# Altium PCB PCB.PcbDoc
Units mm, origin at the board's own origin, x right, y up, seen from the top; angles counter-clockwise.
Board outline 80 x 25 mm, 4 copper layers (Top Layer, Signal Layer 1, Signal Layer 2, Bottom Layer), stack 0.778 mm thick; 103 components, 73 nets, 319 pads, 114 vias.
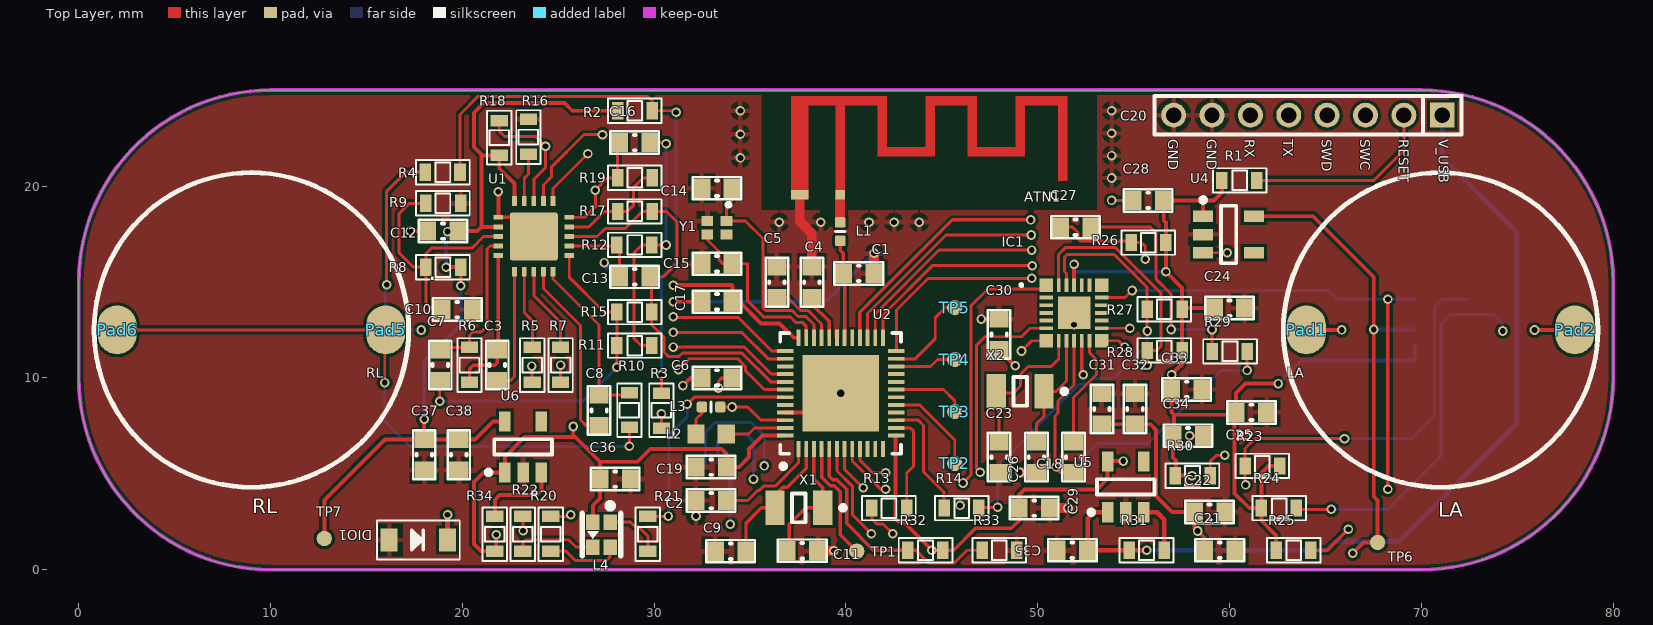
[diagram p0: Top Layer view]
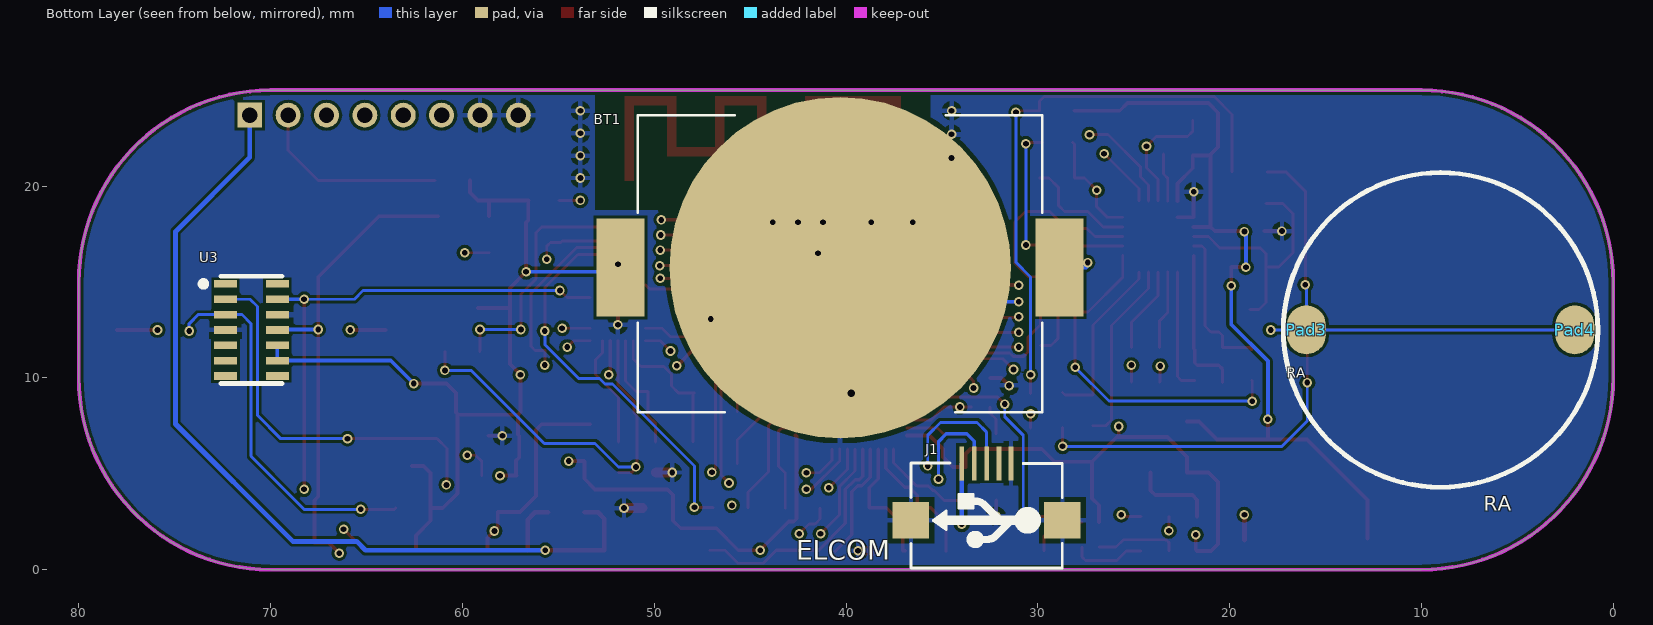
[diagram p1: Bottom Layer view, seen from below]
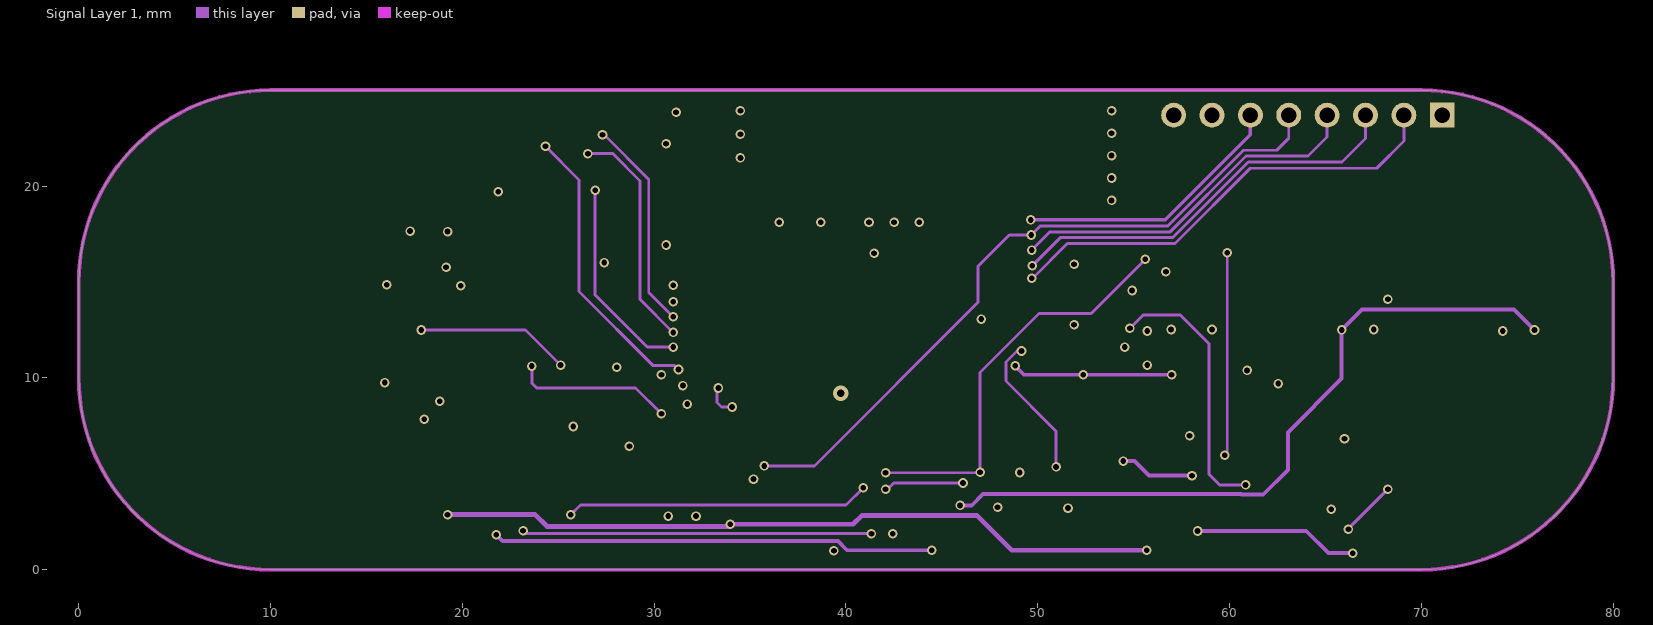
[diagram p2: Signal Layer 1]
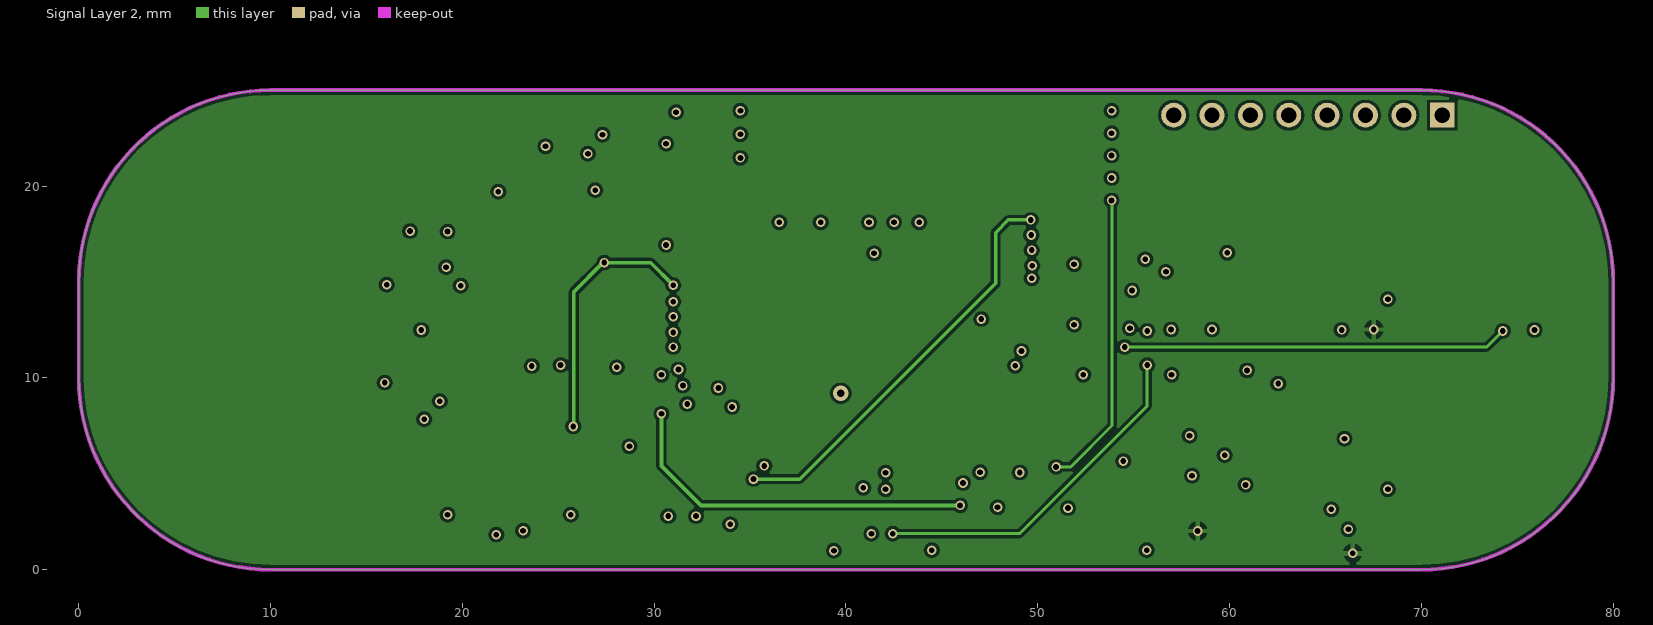
[diagram p3: Signal Layer 2]
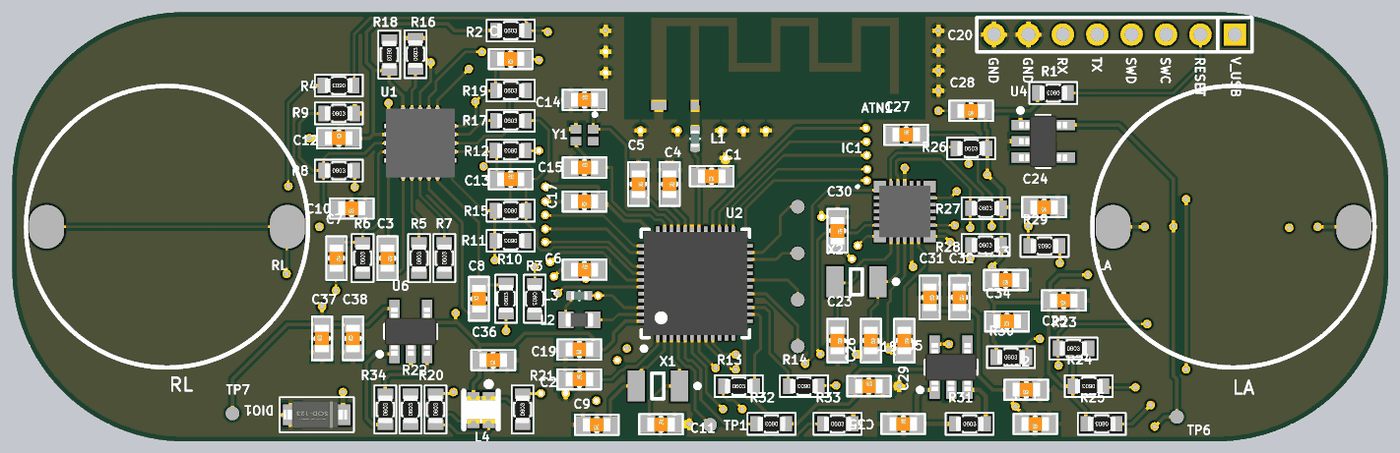
[diagram p4: 3D render of the assembled board from above, using the file's embedded part models]
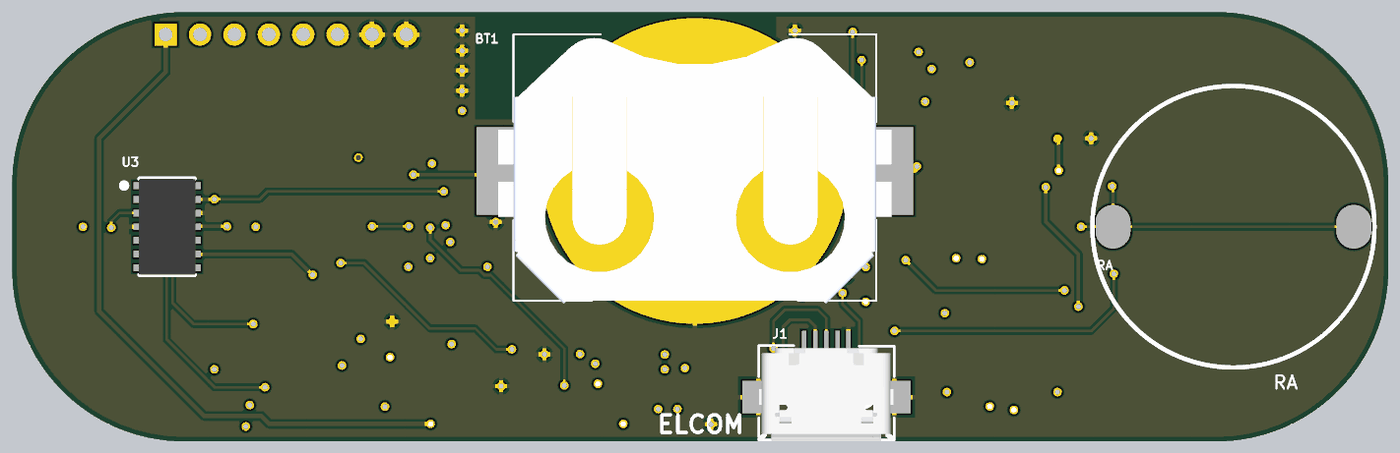
[diagram p5: 3D render of the assembled board from below, using the file's embedded part models]

## Layer stack, top to bottom
Top Solder: solder mask 0.0102, Solder Resist, Dk 3.5
Top Layer: signal copper 0.0356
Dielectric 1: core 0.254, FR-4, Dk 4.2
Signal Layer 1: signal copper 0.036
Dielectric 3: prepreg 0.127, Dk 4.2
Signal Layer 2: signal copper 0.036
Dielectric 2: core 0.254, Dk 4.2
Bottom Layer: signal copper 0.0356
Bottom Solder: solder mask 0.0102, Solder Resist, Dk 3.5

## Board outline
0,10 0,15 cw(c10,15) 10,25 70,25 cw(c70,15) 80,15 80,10 cw(c70,10) 70,0 10,0 cw(c10,10)

## Design rules (kind name [scope] priority, off if disabled: settings)
Clearance [All] p1: gap=0.152
PolygonConnect [All] p1: connectstyle=Relief reliefconductorwidth=0.254 reliefentries=4 polygonreliefangle="90 Angle" airgapwidth=0.254
RoomDefinition [2]Controler [InComponentClass('[2]Controler')] p1: confinementstyle=ConfineIn formatcopy=TRUE lockcomponents=FALSE outline 90.551,40.259 443.611,40.259 443.611,60.706 90.551,60.706
RoomDefinition [1]Power [InComponentClass('[1]Power')] p2: confinementstyle=ConfineIn formatcopy=TRUE lockcomponents=FALSE outline 90.551,0.127 241.046,0.127 241.046,39.116 90.551,39.116
RoutingVias [All] p1: holewidth=0.3 width=0.5 viastyle="Through Hole" minholewidth=0.3 minwidth=0.5 maxholewidth=0.45 maxwidth=0.8
SolderMaskExpansion [All] p1: expansion=0.102
Width [All] p1: maxlimit=1.27 minlimit=0.152 preferedwidth=0.178
30 further rules are at their usual default settings.

## Classes and differential pairs
component class [1]Power: BT1 C30 C31 C32 C33 C34 C35 C36 C37 C38 DIO1 J1 R30 R31 R32 R33 R34 R35 TP6 TP7 U4 U5 U6
component class [2]Controler: ATN1 C1 C2 C3 C4 C5 C6 C7 C8 C9 C10 C11 C12 C13 C14 C15 C16 C17 C18 C19 C20 C21 C22 C23 C24 C25 C26 C27 C28 C29 IC1 L1 L2 L3 L4 Pad1 Pad2 Pad3 Pad4 Pad5 Pad6 R1 R2 R3 R4 R5 R6 R7 R8 R9 R10 R11 R12 R13 R14 R15 R16 R17 R18 R19 R20 R21 R22 R23 R24 R25 R26 R27 R28 R29 TP1 TP2 TP3 TP4 TP5 U1 U2 U3 X1 X2 X? Y1

## Components (designator, comment, footprint, x,y, rotation, side; value= is the part's Value field where it differs from the comment)
ATN1 "P-ANT" "Antenna 2G4" 37.592,21.742 r0 top locked
BT1 "BAT-HLD-001" BAT_BAT-HLD-001 40.31,15.748 r0 bottom
C1 "0.8uF" CN-SMD-0603 40.665,15.443 r180 top
C2 "0.1uF" CN-SMD-0603 32.969,3.607 r0 top
C3 "4.7uF" CN-SMD-0603 21.819,10.668 r270 top
C4 "0.1uF" CN-SMD-0603 38.221,14.986 r270 top
C5 "0.1uF" CN-SMD-0603 36.398,14.986 r270 top
C6 "1uF" CN-SMD-0603 33.274,10.003 r0 top
C7 "4.7uF" CN-SMD-0603 18.847,10.668 r270 top
C8 "1nF" CN-SMD-0603 27.127,8.306 r90 top
C9 "12pF" CN-SMD-0603 33.985,0.965 r180 top
C10 "0.1uF" CN-SMD-0603 19.736,13.564 r180 top
C11 "12pF" CN-SMD-0603 37.719,0.991 r0 top
C12 "0.1uF" CN-SMD-0603 18.987,17.653 r0 top
C13 "6.8nF" CN-SMD-0603 28.981,15.272 r0 top
C14 "12pF" CN-SMD-0603 33.274,19.888 r0 top
C15 "12pF" CN-SMD-0603 33.274,15.951 r0 top
C16 "2.7nF" CN-SMD-0603 28.981,22.268 r180 top
C17 "10uF" CN-SMD-0603 33.274,13.97 r180 top
C18 "0.1uF" CN-SMD-0603 49.809,3.212 r0 top
C19 "0.1uF" CN-SMD-0603 32.969,5.349 r180 top
C20 "JP8x1-2.0" J8-D1T 64.084,23.698 r180 top
C21 "0.1uF" CN-SMD-0603 59.482,1.016 r180 top
C22 "10uF" CN-SMD-0603 58.953,3.004 r180 top
C23 "12pF" CN-SMD-0603 47.981,5.867 r270 top
C24 "0.1uF" CN-SMD-0603 59.995,13.64 r180 top
C25 "10uF" CN-SMD-0603 61.138,8.204 r180 top
C26 "12pF" CN-SMD-0603 49.924,5.867 r270 top
C27 "12pF" CN-SMD-0603 51.968,17.856 r0 top
C28 "12pF" CN-SMD-0603 55.753,19.253 r180 top
C29 "12pF" CN-SMD-0603 51.867,5.867 r270 top
C30 "10uF" CN-SMD-0603 47.981,12.268 r270 top
C31 "10uF" CN-SMD-0603 53.34,8.382 r270 top
C32 "10uF" CN-SMD-0603 55.067,8.382 r270 top
C33 "10uF" CN-SMD-0603 57.76,9.398 r180 top
C34 "10uF" CN-SMD-0603 57.836,6.985 r180 top
C35 "10uF" CN-SMD-0603 51.801,1.016 r0 top
C36 "10uF" CN-SMD-0603 27.965,4.724 r180 top
C37 "10uF" CN-SMD-0603 18.009,5.994 r90 top
C38 "10uF" CN-SMD-0603 19.812,5.994 r90 top
DIO1 "Diode SMD" DIO-SMD-123 17.704,1.549 r180 top
IC1 "MAX32664GTGD+" MAX32664GTGD 51.892,11.938 r0 top
J1 "USB-5" USB-M1 32.664,5.545 r0 bottom
L1 "15nH" "P-INDC-0402INDC1005X60N EIA" 39.7,17.628 r90 top
L2 "10uH" INDC1608X95N 32.969,7.076 r0 top
L3 "15nH" "P-INDC-0402INDC1005X60N EIA" 32.969,8.484 r180 top
L4 "Led RGB 0603 Anot" "Led RGB 0603 Anode" 27.254,1.829 r270 top
Pad1 "LA" pad_ecg#1 64,12.5 r90 top
Pad2 "LA" pad_ecg#2 77.241,11.557 r90 top
Pad3 "RA" pad_ecg#1 16,12.5 r90 bottom
Pad4 "pad_ecg" pad_ecg#3 2,12.5 r90 top
Pad5 "RL" pad_ecg#1 16,12.5 r90 top
Pad6 "pad_ecg" pad_ecg#1 2,12.5 r270 top
R1 "10K" RES-SMD-0603 60.528,20.295 r180 top
R2 "0R" RES-SMD-0603 28.981,23.927 r0 top
R3 "10M" RES-SMD-0603 30.378,8.306 r270 top
R4 "10M" RES-SMD-0603 18.987,20.726 r180 top
R5 "180K" RES-SMD-0603 23.647,10.668 r90 top
R6 "10M" RES-SMD-0603 20.371,10.668 r90 top
R7 "180K" RES-SMD-0603 25.121,10.668 r90 top
R8 "10M" RES-SMD-0603 18.987,15.773 r0 top
R9 "10M" RES-SMD-0603 18.987,19.101 r0 top
R10 "360K" RES-SMD-0603 28.708,8.306 r90 top
R11 "1M" RES-SMD-0603 28.981,11.684 r180 top
R12 "1M" RES-SMD-0603 28.981,16.931 r180 top
R13 "0R" RES-SMD-0603 42.24,3.212 r0 top
R14 "0R" RES-SMD-0603 46.037,3.212 r180 top
R15 "100K" RES-SMD-0603 28.981,13.433 r180 top
R16 "0R" RES-SMD-0603 23.444,22.555 r90 top
R17 "332K" RES-SMD-0603 28.981,18.68 r0 top
R18 "10K" RES-SMD-0603 21.92,22.53 r270 top
R19 "1M" RES-SMD-0603 28.981,20.429 r0 top
R20 "1K" RES-SMD-0603 24.613,1.854 r90 top
R21 "1K" RES-SMD-0603 29.667,1.854 r90 top
R22 "1K" RES-SMD-0603 23.152,1.854 r90 top
R23 "4.7K" RES-SMD-0603 61.697,5.41 r0 top
R24 "4.7K" RES-SMD-0603 62.586,3.213 r180 top
R25 "10K" RES-SMD-0603 63.348,1.016 r180 top
R26 "10K" RES-SMD-0603 55.753,17.055 r0 top
R27 "4.7K" RES-SMD-0603 56.591,13.584 r0 top
R28 "4.7K" RES-SMD-0603 56.591,11.43 r0 top
R29 "10R" RES-SMD-0603 60.02,11.379 r180 top
R30 "1K" RES-SMD-0603 58.064,4.902 r0 top
R31 "1K" RES-SMD-0603 55.667,1.016 r0 top
R32 "100K" RES-SMD-0603 44.145,1.016 r180 top
R33 "100K" RES-SMD-0603 47.986,1.016 r0 top
R34 "1K" RES-SMD-0603 21.692,1.854 r90 top
TP1 "TP" "P-TP 1MM" 40.564,0.965 r90 top
TP2 "TP" "P-TP 1MM" 45.669,5.537 r90 top
TP3 "TP" "P-TP 1MM" 45.669,8.247 r90 top
TP4 "TP" "P-TP 1MM" 45.669,10.956 r90 top
TP5 "TP" "P-TP 1MM" 45.669,13.665 r90 top
TP6 "TP" "P-TP 1MM" 67.716,1.422 r90 top
TP7 "TP" "P-TP 1MM" 12.802,1.626 r90 top
U1 "AD8232" LFCSP_20 23.724,17.374 r90 top
U2 "Nrf52832" QFN48_NRF52832 39.726,9.195 r90 top
U3 "MAX30101" MAX30101 71,12.5 r180 bottom
U4 "AP2112-1V8" SOT235_AP2112 59.944,17.475 r0 top
U5 "AP2112-3V3" SOT235_AP2112 54.585,4.318 r90 top
U6 "AP2112-2V8" SOT235_AP2112 23.165,6.401 r90 top
X1 "32.768KhZ" XT2-32.768KHz-2_V 37.541,3.226 r180 top
X2 "32.768KhZ" XT2-32.768KHz-2_V 49.081,9.296 r180 top
Y1 "ABM12" DFN160X120X45-4N 33.274,17.831 r270 top

## Footprints (in the part's own frame and the unit in brackets; to place one, negate y for a bottom-side part, rotate by r counter-clockwise, add the part's x,y. Pads: shape width x height; smd on the part's side, far side on the other; paste and mask are expansions set on the pad)
"Antenna 2G4" [mm]
  rect 0.9x0.5 smd: 1(0,-2.2)
  rect 0.5x0.5 smd: 2(2.1,-2.2)
  Top Layer region: -0.45,-2.45 0.45,-2.45 0.45,2.45 -0.45,2.45
  Top Layer region: -0.45,2.45 4.55,2.45 4.55,2.95 -0.45,2.95
  Top Layer region: 1.85,-2.45 2.35,-2.45 2.35,2.45 1.85,2.45
  Top Layer region: 4.05,-0.2 4.55,-0.2 4.55,2.45 4.05,2.45
  Top Layer region: 6.55,-0.2 6.55,0.3 4.55,0.3 4.55,-0.2
  Top Layer region: 6.55,-0.2 7.05,-0.2 7.05,2.45 6.55,2.45
  Top Layer region: 6.55,2.45 9.25,2.45 9.25,2.95 6.55,2.95
  Top Layer region: 11.25,2.45 13.95,2.45 13.95,2.95 11.25,2.95
  Top Layer region: 11.25,-0.2 11.75,-0.2 11.75,2.45 11.25,2.45
  Top Layer region: 11.25,-0.2 11.25,0.3 9.25,0.3 9.25,-0.2
  Top Layer region: 8.75,-0.2 9.25,-0.2 9.25,2.45 8.75,2.45
  Top Layer region: 13.45,-1.49 13.95,-1.49 13.95,2.45 13.45,2.45
  Top Layer pour cut-out: -2,5 -2,-3 15.5,-3 15.5,5
  Bottom Layer pour cut-out: -2,5 -2,-3 15.5,-3 15.5,5
BAT_BAT-HLD-001 [mm]
  round 17.8 smd paste-10: N1(0,0)
  rect 2.5x5.1 smd: P1(-11.45,0) P2(11.45,0)
  silkscreen extent -10.55,-7.95 10.55,7.55, body extent -11.43,-7.75 11.43,7.75, height 4.32
CN-SMD-0603 [mm]
  rect 0.9x1 smd: 1(-0.8,0) 2(0.8,0)
  silkscreen extent -1.27,-0.58 1.27,0.58, body extent -0.8,-0.4 0.8,0.4, height 0.3
DFN160X120X45-4N [mm]
  rect 0.51x0.61 smd: 1(-0.35,0.5) 2(-0.35,-0.5) 3(0.35,-0.5) 4(0.35,0.5)
  silkscreen extent -1.3,0.5 -1.1,0.7
DIO-SMD-123 [mm]
  rect 0.9x1.2 smd: 1(1.524,0) 2(-1.524,0)
  silkscreen extent -2.16,-1.02 2.16,1.02, body extent -1.76,-0.8 1.94,0.8, height 1.25
INDC1608X95N [mm]
  rect 0.9x0.97 smd: 1(-0.785,0) 2(0.785,0)
  body extent -0.8,-0.4 0.8,0.4, height 0.78
J8-D1T [mm] "8 pins, 1 row, straight, gold plating"
  rect 1.3x1.3 hole 0.8: 1(-7,0)
  round 1.3 hole 0.8: 2(-5,0) 3(-3,0) 4(-1,0) 5(1,0) 6(3,0) 7(5,0) 8(7,0)
  silkscreen extent -8,-1 8,1
"Led RGB 0603 Anode" [mm]
  rect 0.8x0.7 smd: 1(-0.65,0.45) 2(-0.65,-0.45) 3(0.65,-0.45) 4(0.65,0.45)
  silkscreen extent -1.65,-1 1.1,1, body extent -0.8,-0.85 0.8,0.85, height 0.75
LFCSP_20 [mm]
  rect 0.5x0.25 smd: 1(-1.85,1) 2(-1.85,0.5) 3(-1.85,0) 4(-1.85,-0.5) 5(-1.85,-1) 11(1.85,-1) 12(1.85,-0.5) 13(1.85,0) 14(1.85,0.5) 15(1.85,1)
  rect 0.25x0.5 smd: 6(-1,-1.85) 7(-0.5,-1.85) 8(0,-1.85) 9(0.5,-1.85) 10(1,-1.85) 16(1,1.85) 17(0.5,1.85) 18(0,1.85) 19(-0.5,1.85) 20(-1,1.85)
  rrect10% 2.5x2.5 smd paste-2: PAD(0,0)
  body extent -2.05,-2.05 2.05,2.05, height 0.8
MAX30101 [mm]
  rect 1.2x0.4 smd: 1(-1.35,2.4) 2(-1.35,1.6) 3(-1.35,0.8) 4(-1.35,0) 5(-1.35,-0.8) 6(-1.35,-1.6) 7(-1.35,-2.4) 8(1.35,-2.4) 9(1.35,-1.6) 10(1.35,-0.8) 11(1.35,0) 12(1.35,0.8) 13(1.35,1.6) 14(1.35,2.4)
  silkscreen extent -2.65,-2.8 1.6,2.8, body extent -1.65,-2.8 1.65,2.8, height 1.57
MAX32664GTGD [mm]
  rect 0.7x0.7 smd: 1(-1.45,2.9) 7(-1.45,0) 13(1.45,0) 19(1.45,2.9)
  rect 0.7x0.2 smd: 2(-1.45,2.25) 3(-1.45,1.85) 4(-1.45,1.45) 5(-1.45,1.05) 6(-1.45,0.65) 14(1.45,0.65) 15(1.45,1.05) 16(1.45,1.45) 17(1.45,1.85) 18(1.45,2.25)
  rect 0.2x0.7 smd: 8(-0.8,0) 9(-0.4,0) 10(0,0) 11(0.4,0) 12(0.8,0) 20(0.8,2.9) 21(0.4,2.9) 22(0,2.9) 23(-0.4,2.9) 24(-0.8,2.9)
  rect 1.7x1.7 smd: 25(0,1.45)
  silkscreen extent -2.8,2.85 -2.7,2.95, body extent -1.5,-0.05 1.5,2.95, height 0.9
"P-INDC-0402INDC1005X60N EIA" [mm]
  rrect30% 0.55x0.55 smd mask+0.05: 1(-0.48,0) 2(0.48,0)
  silkscreen extent 0,-0.25 0,0.25, body extent -0.5,-0.25 0.5,0.25, height 0.6
"P-TP 1MM" [mm]
  round 0.8 smd mask+0.051: 1(0,0)
pad_ecg#1 [mil]
  oval 100x80 smd: 0(0,0)
pad_ecg#2 [mil]
  oval 100x80 smd: 0(37.13,-29.87)
pad_ecg#3 [mil]
  oval 100x80 smd far side: 0(0,0)
QFN48_NRF52832 [mm]
  rect 0.85x0.2 smd: 1(-2.9,2.2) 2(-2.9,1.8) 3(-2.9,1.4) 4(-2.9,1) 5(-2.9,0.6) 6(-2.9,0.2) 7(-2.9,-0.2) 8(-2.9,-0.6) 9(-2.9,-1) 10(-2.9,-1.4) 11(-2.9,-1.8) 12(-2.9,-2.2) 25(2.9,-2.2) 26(2.9,-1.8) 27(2.9,-1.4) 28(2.9,-1) 29(2.9,-0.6) 30(2.9,-0.2) 31(2.9,0.2) 32(2.9,0.6) 33(2.9,1) 34(2.9,1.4) 35(2.9,1.8) 36(2.9,2.2)
  rect 0.2x0.85 smd: 13(-2.2,-2.9) 14(-1.8,-2.9) 15(-1.4,-2.9) 16(-1,-2.9) 17(-0.6,-2.9) 18(-0.2,-2.9) 19(0.2,-2.9) 20(0.6,-2.9) 21(1,-2.9) 22(1.4,-2.9) 23(1.8,-2.9) 24(2.2,-2.9) 37(2.2,2.9) 38(1.8,2.9) 39(1.4,2.9) 40(1,2.9) 41(0.6,2.9) 42(0.2,2.9) 43(-0.2,2.9) 44(-0.6,2.9) 45(-1,2.9) 46(-1.4,2.9) 47(-1.8,2.9) 48(-2.2,2.9)
  rect 4x4 smd: 49(0,0)
  silkscreen extent -3.92,-3.15 3.15,3.15, body extent -3.02,-3.02 3.02,3.02, height 0.85
RES-SMD-0603 [mm]
  rect 0.6x0.9 smd: 1(-0.889,0) 2(0.927,0)
  silkscreen extent -1.4,-0.64 1.4,0.64, body extent -0.8,-0.4 0.8,0.4, height 0.43
SOT235_AP2112 [mm]
  rect 1.05x0.6 smd: 1(-1.325,0.95) 2(-1.325,0) 3(-1.325,-0.95) 4(1.325,-0.95) 5(1.325,0.95)
  silkscreen extent -1.45,-1.5 0.4,1.92, body extent -1.4,-1.5 1.4,1.5, height 1.2
USB-M1 [mil]
  rect 10x70 smd: 1(51.18,0) 2(25.59,0) 3(0,0) 4(-25.59,0) 5(-50,0)
  rect 74.8x74.8 smd: 5(-155.51,116.84) 5(155.51,116.84)
  silkscreen extent -155,-1 155,215, body extent -157,5 158,218, height 107
XT2-32.768KHz-2_V [mm] "Hand Drawn, 2-Leads, Body 3.2x1.5mm, Pitch 2.5mm"
  rect 1x1.8 smd: 1(-1.25,0) 2(1.25,0)
  silkscreen extent -2.43,-0.75 0.35,0.75, body extent -1.6,-0.75 1.6,0.75, height 0.9

## Part data
BT1: "Holder for CR2032 and CR2025 Batteries, Surface-Mount, Bulk Packaging"
C1 C2 C3 C4 C5 C6 C7 C8 C9 C10 C11 C12 C13 C14 C15 C16 C17 C18 C19 C21 C22 C23 C24 C25 C26 C27 C28 C29 C30 C31 C32 C33 C34 C35 C36 C37 C38: library part CN, "Tu gom"
C20: "WR-PHD 2.00 mm Socket Header"
DIO1: "Default Diode"
IC1: "Integrated Circuit"
L1 L3: library part P-INDC-0603
L2: library part ASMCI-0603-100N-T, "Ind Chip Shielded Multi-Layer 10uH 30% 1MHz Ferrite 50mA 0603 T/R"
Pad1 Pad2 Pad3 Pad5: library part pad_ecg, "pad_ecg"
R1 R2 R3 R4 R5 R6 R7 R8 R9 R10 R11 R12 R13 R14 R15 R16 R17 R18 R19 R20 R21 R22 R23 R24 R25 R26 R27 R28 R29 R30 R31 R32 R33 R34: library part Res-SMD, "Resistor"
TP1 TP2 TP3 TP4 TP5 TP6 TP7: library part P-TESTPOINT
U1: "ECG Front End 20-LFCSP-WQ _4x4_"
U2: "BLE SoC"
U3: "Pulse oximeter and Heart rate sensor"
U4 U5: "600mA CMOS LDO REGULATOR WITH ENABLE"
U6: library part AP2112-1V8, "600mA CMOS LDO REGULATOR WITH ENABLE"
X1 X2: library part XT2, "Crystal, 32.768 KHz, -40 to 85 degC, 3.2 x 1.5 x 0.9 mm SMD"
Y1: library part ABM12-32.000MHZ-B2X-T3

## Via types
v1: diameter 0.5, hole 0.3, Top Layer to Bottom Layer, 113 vias
v2: diameter 0.8, hole 0.4, Top Layer to Bottom Layer, 1 vias

## Nets (pads, with @x,y where several pads share a name; then routed paths per layer and width w, separated by ;. In a path a pad name is that pad's centre, name@x,y a point inside that pad or via, vN(x,y) a via of type N, cw(c..) or ccw(c..) an arc to the next point about the centre after c; other vN are vias at no path point)
1V8: C21.2 C22.2 C31.2 C32.2 TP6.1 U3.11 U4.5 | length 44.7
  Top Layer w0.203: C31.2 C32.2 55.867,7.582 56.159,7.29 56.159,3.835 56.991,3.004 C22.2 58.153,2.197 v1(58.331,2.019) 58.682,1.668 C21.2 ; U4.5 64.353,18.425 67.513,15.265 v1(67.513,12.522) 67.513,3.81 67.716,3.607 TP6.1 66.98,1.422 v1(66.421,0.864)
  Signal Layer 1 w0.203: v1(58.331,2.019) 63.995,2.019 65.151,0.864 v1(66.421,0.864)
  Bottom Layer w0.203: v1(67.513,12.522) 69.628,12.522 U3.11
2V8: C12.2 C37.2 C38.2 R2.1 R8.2 R18.2 TP7.1 U1.15 U1.17 U6.5 | length 45.9
  Top Layer w0.203: TP7.1 12.802,3.632 15.964,6.794 C37.2 ; v1(18.009,7.849) C37.2 ; v1(19.151,15.774) R8.2 v1(19.914,14.808) ; v1(19.228,17.628) 19.253,17.653 C12.2 20.777,17.653 20.998,17.874 ; U1.17 20.998,17.874 ; U6.5 21.594,7.726 20.663,6.794 C38.2 C37.2 ; U1.15 22.724,20.126 21.92,20.929 R18.2 21.044,21.603 ; R2.1 25.73,23.927 25.324,24.333 21.107,24.333 20.599,23.825 20.599,22.047 21.044,21.603 ; 20.998,17.874 20.998,21.557 21.044,21.603
  Bottom Layer w0.203: v1(18.009,7.849) 18.009,10.871 19.914,12.776 v1(19.914,14.808) ; v1(19.151,15.774) 19.151,17.551 v1(19.228,17.628)
3V3: BT1.P1 BT1.P2 C17.1 C18.1 C19.1 C24.2 C25.2 C28.1 C30.2 C33.2 C34.2 C36.2 IC1.11 IC1.22 L4.2 R1.2 R23.2 R24.2 R25.2 R26.2 R27.2 R28.2 R30.1 R32.1 R34.1 U2.13 U2.36 U2.48 U3.9 U3.10 U4.1 U5.5 U6.1 | length 166
  Top Layer w0.203: v1(21.768,1.829) 21.768,1.041 R34.1 20.98,0.965 20.599,1.346 20.599,4.572 21.103,5.076 U6.1 22.215,5.883 23.241,6.909 25.883,6.909 ; v1(25.781,7.468) 25.781,7.01 25.883,6.909 ; L4.2 26.804,3.36 27.165,3.721 C36.2 27.165,5.626 ; v1(30.988,14.834) 34.036,14.834 34.074,14.796 C17.1 34.443,13.97 35.571,12.842 36.535,12.842 37.283,12.095 U2.36 ; U2.48 35.646,6.995 34.95,6.299 34.95,5.867 34.432,5.349 C19.1 33.769,6.033 33.503,6.299 29.794,6.299 29.121,5.626 27.165,5.626 ; U2.13 42.575,6.944 42.575,2.657 42.724,2.508 42.983,2.508 v1(44.475,1.016) R32.1 45.618,1.016 46.761,2.159 48.616,2.159 49.009,2.553 C18.1 49.009,3.899 49.301,4.191 53.086,4.191 53.635,4.74 U5.5 53.656,5.664 v1(54.458,5.664) ; C30.2 v1(48.819,10.63) ; IC1.22 v1(51.892,15.926) ; IC1.11 52.292,10.242 v1(52.371,10.163) ; v1@56.96,10.163 C33.2 56.96,8.217 57.099,8.077 ; v1@56.962,10.176 57.518,10.731 R28.2 R27.2 ; v1(58.039,4.902) R30.1 57.201,4.928 57.201,5.69 57.036,5.855 C34.2 57.099,7.048 57.099,8.077 ; U4.1 58.619,19.249 58.623,19.253 ; C24.2 57.573,13.64 R27.2 ; R1.2 59.601,19.673 59.182,19.253 58.623,19.253 ; R25.2 62.421,1.79 61.659,2.552 R24.2 ; v1(62.535,9.703) 60.833,9.703 60.338,9.208 C25.2 C25.2@60.254,8.12 ; R23.2 62.027,5.41 61.659,5.042 R24.2 ; 25.883,6.909 27.165,5.626 ; 57.099,8.077 60.211,8.077 C25.2@60.254,8.12 ; R27.2 57.518,14.694 v1(56.68,15.532) R26.2 56.68,18.098 56.566,18.212 56.566,19.24 C28.1 58.623,19.253 ; C25.2@60.254,8.12 60.254,3.983 61.024,3.213 R24.2
  Signal Layer 1 w0.203: v1(21.768,1.829) 22.102,1.495 39.579,1.495 40.057,1.016 v1(44.475,1.016) ; v1(48.819,10.63) 49.286,10.163 v1(52.371,10.163) v1(56.975,10.163) ; v1(54.458,5.664) 55.042,5.664 55.804,4.902 v1(58.039,4.902)
  Signal Layer 2 w0.203: v1(25.781,7.468) 25.806,7.493 25.806,14.478 27.341,16.012 v1(27.403,16.012) 27.392,16.002 29.82,16.002 v1(30.988,14.834)
  Bottom Layer w0.203: v1(27.403,16.012) 27.403,15.828 27.483,15.748 BT1.P1 ; BT1.P2 51.975,15.532 v1(56.68,15.532) ; v1(62.535,9.703) 63.732,10.9 U3.9 U3.10
DEC1: C2.2 U2.1 | length 5.3
  Top Layer w0.152: C2.2 34.874,3.607 35.408,4.14 35.482,4.14 35.697,4.354 36.308,4.354 37.526,5.572 U2.1
DEC2: C4.2 U2.32 | length 2.5
  Top Layer w0.178: C4.2 38.221,13.849 39.126,12.944 U2.32
DEC3: C5.2 U2.33 | length 3.6
  Top Layer w0.152: C5.2 36.948,14.186 37.626,13.507 38.029,13.507 38.726,12.811 U2.33
DEC4: C6.2 L3.1 U2.46 | length 6.5
  Top Layer w0.152: v1(33.35,9.474) 33.35,9.83 33.523,10.003 C6.2 ; L3.1 v1(34.061,8.484) 34.874,8.484 35.563,7.795 U2.46
  Signal Layer 1 w0.152: v1(33.35,9.474) 33.274,9.398 33.274,8.712 33.503,8.484 v1(34.061,8.484)
ECG_LO+: U1.12 U2.37 | length 22.9
  Top Layer w0.152: U1.12 24.224,20.059 24.638,20.473 24.638,20.98 26.34,22.682 v1(27.305,22.682) ; v1(30.988,13.183) 31.013,13.157 34.366,13.157 36.129,11.395 U2.37
  Signal Layer 1 w0.152: v1(27.305,22.682) 27.381,22.682 29.718,20.345 29.718,14.453 v1(30.988,13.183)
ECG_LO-: U1.11 U2.38 | length 21.6
  Top Layer w0.152: U1.11 24.724,19.872 v1(26.543,21.692) ; v1(30.988,12.37) 34.569,12.37 35.944,10.995 U2.38
  Signal Layer 1 w0.152: v1(26.543,21.692) 27.838,21.692 29.261,20.269 29.261,14.097 v1(30.988,12.37)
ECG_OUT: C16.2 R19.1 U1.10 U2.40 | length 22.8
  Top Layer w0.152: U1.10 26.375,18.374 26.949,18.948 v1@26.949,19.787 ; v1@26.949,19.812 27.566,20.429 R19.1 28.092,22.179 C16.2 ; v1(30.988,11.608) 34.696,11.608 36.109,10.195 U2.40
  Signal Layer 1 w0.152: v1(26.924,19.787) 26.924,14.326 29.642,11.608 v1(30.988,11.608)
ECG_SDN: R18.1 U1.13 U2.42 | length 28.1
  Top Layer w0.152: R18.1 21.92,22.86 22.2,22.581 23.825,22.581 v1(24.333,22.073) 24.333,20.955 23.724,20.345 U1.13 ; v1(31.267,10.439) 31.826,10.998 34.352,10.998 34.753,10.597 34.753,10.383 35.741,9.395 U2.42
  Signal Layer 1 w0.152: v1(24.333,22.073) 26.086,20.32 26.086,14.503 29.951,10.639 31.068,10.639 v1(31.267,10.439)
GND: ATN1.1 BT1.N1 C1.1 C2.1 C4.1 C5.1 C6.1 C9.2 C10.1 C11.2 C12.1 C14.1 C15.1 C17.2 C18.2 C19.2 C20.7 C20.8 C21.1 C22.1 C23.2 C24.1 C25.1 C26.2 C30.1 C31.1 C32.1 C33.1 C34.1 C35.1 C36.1 C37.1 C38.1 DIO1.1 IC1.25 J1.5 R9.2 R16.2 R33.2 U1.16 U1.PAD U2.31 U2.45 U2.49 U3.4 U3.12 U4.2 U5.2 U6.2 Y1.2 | length 30
  Top Layer w0.203: v1(17.272,17.653) C12.1 ; v1(21.874,19.706) U1.16 U1.PAD@22.724,18.374 ; v1(30.988,13.97) C17.2 ; v1(31.496,9.601) 31.897,10.003 C6.1 ; C2.1 32.169,2.807 v1(32.182,2.794) ; U2.45 U2.49@38.726,8.195 ; v1(47.053,13.068) C30.1 ; v1(51.892,12.776) IC1.25 ; v1(57.912,6.985) C34.1
  Top Layer w0.508: ATN1.1 37.592,18.161 38.221,17.532 C4.1 ; C11.2 v1(39.37,0.991) ; C1.1 v1(41.465,16.497) ; v1(49.06,5.067) C26.2 ; C18.2 v1(51.576,3.212)
  Bottom Layer w0.203: v1(30.988,13.97) 38.938,13.97 v1(41.465,16.497)
  other v1: 36.525,18.11 38.684,18.11 41.199,18.11 42.507,18.11 43.815,18.11 53.848,20.422 34.493,21.469 53.848,21.59 34.493,22.698 53.848,22.758 34.493,23.927 53.848,23.927
  other v2: 39.726,9.195
MAX_MFIO: IC1.1 U2.8 | length 20.9
  Top Layer w0.152: U2.8 40.326,5.674 41.808,4.191 v1(42.062,4.191) ; v1(46.101,4.521) 46.507,4.928 46.507,13.741 47.396,14.63 50.235,14.63 IC1.1
  Signal Layer 1 w0.152: v1(42.062,4.191) 42.164,4.191 42.494,4.521 v1(46.101,4.521)
MAX_RSTN: C27.1 IC1.6 R26.1 U2.9 | length 39.8
  Top Layer w0.152: U2.9 40.726,5.705 41.376,5.055 v1(42.062,5.055) ; v1(46.99,5.08) 46.812,5.258 46.812,11.709 47.25,12.147 49.155,12.147 49.596,12.588 IC1.6 ; C27.1 51.816,17.856 52.09,17.582 52.09,17.262 52.224,17.128 54.791,17.128 R26.1 55.411,17.055 55.601,16.866 v1(55.601,16.18)
  Signal Layer 1 w0.152: v1(42.062,5.055) 46.99,5.055 v1(46.99,5.08) 46.99,10.287 50.063,13.36 52.781,13.36 v1(55.601,16.18)
MAX_SCL: IC1.14 R23.1 U3.2 | length 35.4
  Top Layer w0.152: IC1.14 v1(54.803,12.588) ; v1(60.833,4.42) 60.808,4.445 R23.1 60.808,6.325 61.316,6.833 v1(65.989,6.833)
  Signal Layer 1 w0.152: v1(54.803,12.588) 55.499,13.284 57.429,13.284 58.928,11.786 58.928,4.978 59.487,4.42 v1(60.833,4.42)
  Bottom Layer w0.152: v1(65.989,6.833) 69.469,6.833 70.688,8.052 70.688,13.716 71.072,14.1 U3.2
MAX_SDA: IC1.13 R24.1 U3.3 | length 41
  Top Layer w0.152: IC1.13 54.204,11.938 v1(54.534,11.608) ; R24.1 63.538,3.15 v1(65.303,3.15)
  Signal Layer 2 w0.152: v1(54.534,11.608) 73.406,11.608 v1(74.244,12.446)
  Bottom Layer w0.152: v1(65.303,3.15) 68.25,3.15 71.018,5.918 71.018,12.827 71.491,13.3 U3.3 73.771,13.3 74.244,12.827 v1(74.244,12.446)
NetATN1_2: ATN1.2 L1.2 | length 1.4
  Top Layer w0.508: ATN1.2 39.692,18.116 L1.2
NetC3_1: C3.1 R6.1 U1.20 | length 7.9
  Top Layer w0.178: R6.1 20.371,10.465 20.574,10.668 21.692,10.668 21.819,10.795 C3.1 21.874,11.523 U1.20
NetC3_2: C3.2 U1.1 | length 6.4
  Top Layer w0.152: C3.2 22.517,9.868 22.724,10.074 U1.1
NetC7_1: C7.1 R6.2 U1.19 | length 8
  Top Layer w0.152: C7.1 18.974,11.595 R6.2 20.371,12.217 20.549,12.395 20.98,12.395 21.285,12.7 21.285,16.713 21.446,16.874 U1.19
NetC7_2: C7.2 R11.2 R15.2 U1.6 | length 18.3
  Top Layer w0.152: v1(18.821,8.788) 18.821,9.843 C7.2 ; U1.6 25.574,15.244 27.385,13.433 R15.2 R11.2 v1(28.054,10.554)
  Bottom Layer w0.152: v1(18.821,8.788) 26.289,8.788 v1(28.054,10.554)
NetC8_1: C8.1 U1.4 | length 9.6
  Top Layer w0.152: U1.4 24.224,14.664 26.162,12.725 26.162,7.798 26.454,7.506 C8.1
NetC8_2: C8.2 R10.2 U1.5 | length 9
  Top Layer w0.152: U1.5 24.724,15.154 27.127,12.751 C8.2 28.581,9.106 R10.2
NetC9_1: C9.1 U2.2 X1.2 | length 7.2
  Top Layer w0.178: C9.1 34.785,2.426 35.585,3.226 X1.2 36.291,3.889 36.695,4.293 36.932,4.293 37.926,5.287 U2.2
NetC10_2: C10.2 R8.1 R9.1 U1.18 | length 13.1
  Top Layer w0.152: R9.1 17.246,19.101 16.688,18.542 16.688,16.535 17.45,15.773 R8.1 ; C10.2 18.466,13.564 18.098,13.932 R8.1 ; U1.18 21.107,17.374 20.498,16.764 18.39,16.764 18.098,16.472 R8.1
NetC11_1: C11.1 U2.3 X1.1 | length 6.9
  Top Layer w0.178: C11.1 37.033,0.991 37.033,2.362 37.897,3.226 X1.1 38.791,4.277 38.326,4.743 U2.3
NetC13_1: C13.1 R12.2 U1.7 | length 4.2
  Top Layer w0.152: U1.7 27.997,16.874 R12.2 28.181,16.804 C13.1
NetC14_2: C14.2 U2.34 Y1.1 | length 11.4
  Top Layer w0.152: C14.2 34.074,19.291 33.774,18.991 Y1.1 34.753,18.181 35.67,17.264 35.67,13.641 35.804,13.507 37.195,13.507 37.5,13.203 37.903,13.203 38.326,12.78 U2.34
NetC15_2: C15.2 U2.35 Y1.3 | length 9.3
  Top Layer w0.152: Y1.3 32.774,17.188 33.376,16.586 33.376,16.154 33.579,15.951 C15.2 34.874,15.951 34.874,14.006 35.707,13.172 37.099,13.172 37.374,12.898 37.724,12.898 37.926,12.697 U2.35
NetC16_1: C16.1 R11.1 R12.1 | length 13.5
  Top Layer w0.152: C16.1 30.564,22.268 v1(30.622,22.21) ; R11.1 29.312,11.684 28.956,12.04 28.956,16.535 29.352,16.931 R12.1 v1(30.622,16.931)
  Bottom Layer w0.152: v1(30.622,16.931) v1(30.622,22.21)
NetC23_1: C23.1 IC1.8 X2.2 | length 7.8
  Top Layer w0.152: C23.1 47.981,9.146 47.904,9.223 48.745,9.223 49.098,9.576 49.098,10.185 49.505,10.592 50.698,10.592 51.092,10.986 IC1.8
NetC26_1: C26.1 IC1.9 X2.1 | length 6.3
  Top Layer w0.152: C26.1 49.924,7.607 50.331,8.014 X2.1 50.952,9.296 51.492,9.836 IC1.9
NetC27_2: C27.2 R29.2 | length 12.2
  Top Layer w0.152: C27.2 55.88,17.856 56.151,17.585 56.151,15.172 56.947,14.376 v1(56.947,12.522) ; v1(59.08,12.522) 59.08,11.392 R29.2
  Bottom Layer w0.152: v1(56.947,12.522) v1(59.08,12.522)
NetC28_2: C28.2 C29.2 IC1.7 IC1.10 R29.1 | length 46.8
  Top Layer w0.152: v1(49.149,11.405) 49.682,11.938 IC1.7 ; v1@50.902,5.359 50.902,8.01 51.059,8.168 51.059,8.794 51.892,9.627 IC1.10 ; v1@50.914,5.321 51.168,5.067 C29.2 ; v1@53.873,19.253 C28.2 ; v1(60.909,10.389) R29.1
  Signal Layer 1 w0.152: v1(49.149,11.405) 48.917,11.405 48.34,10.828 48.34,9.833 50.952,7.221 v1(50.952,5.359)
  Signal Layer 2 w0.152: v1(50.952,5.359) 51.714,5.359 53.873,7.518 v1@53.873,19.253
  Bottom Layer w0.152: v1(50.952,5.359) 51.867,5.359 53.086,6.579 55.728,6.579 59.538,10.389 v1(60.909,10.389)
  other v1: 53.848,19.253
NetC29_1: C29.1 IC1.12 | length 5.9
  Top Layer w0.152: C29.1 51.867,8.982 53.061,10.176 53.061,10.947 52.692,11.316 IC1.12
NetL2_1: L2.1 L3.2 | length 1.5
  Top Layer w0.152: L2.1 32.184,7.851 32.489,8.156 L3.2
NetL2_2: L2.2 U2.47 | length 3.2
  Top Layer w0.152: L2.2 34.915,7.076 35.233,7.395 U2.47
NetL4_1: L4.1 R21.1 | length 3.1
  Top Layer w0.152: L4.1 28.762,2.479 28.988,2.252 29.167,2.252 29.667,1.753 R21.1
NetL4_3: L4.3 R22.1 | length 4.3
  Top Layer w0.152: R22.1 23.152,1.41 23.296,1.553 23.363,1.553 23.372,1.562 25.54,1.562 25.923,1.179 L4.3
NetL4_4: L4.4 R20.1 | length 3.9
  Top Layer w0.152: R20.1 25.4,0.965 25.883,0.483 27.508,0.483 27.704,0.679 L4.4
NetPad1_0: Pad1.0 Pad2.0 R3.2 R5.1 | length 70.3
  Top Layer w0.152: v1(23.622,10.617) 23.622,9.804 R5.1 ; R3.2 v1(30.379,8.128)
  Top Layer w0.203: Pad1.0 v1(65.84,12.5) ; v1(75.895,12.497) 77.997,12.497 Pad2.0
  Signal Layer 1 w0.152: v1(23.622,10.617) 23.622,9.728 23.876,9.474 29.032,9.474 v1(30.379,8.128)
  Signal Layer 1 w0.203: v1(45.949,3.353) 46.558,3.353 47.142,3.937 60.603,3.937 60.624,3.916 61.751,3.916 63.043,5.207 63.043,7.163 65.84,9.96 v1(65.84,12.5) 66.904,13.564 74.828,13.564 v1(75.895,12.497)
  Signal Layer 2 w0.203: v1(30.379,8.128) 30.379,5.41 32.436,3.353 v1(45.949,3.353)
NetPad3_0: Pad3.0 Pad4.0 R4.2 R7.1 | length 34.4
  Top Layer w0.152: v1(16.053,14.859) 16.053,19.736 17.043,20.726 R4.2 ; R7.1 v1(25.121,10.668)
  Signal Layer 1 w0.152: v1(17.856,12.497) 23.292,12.497 v1(25.121,10.668)
  Bottom Layer w0.152: Pad4.0 Pad3.0 ; v1(16.053,14.859) 16,14.806 Pad3.0 ; v1(17.856,12.497) 16.003,12.497 Pad3.0
NetPad5_0: Pad5.0 Pad6.0 R10.1 | length 33.1
  Top Layer w0.152: Pad6.0 Pad5.0 15.951,12.451 v1(15.951,9.754) ; v1(28.708,6.432) R10.1
  Bottom Layer w0.152: v1(15.951,9.754) 15.951,7.747 17.266,6.432 v1(28.708,6.432)
NetR2_2: R2.2 R3.1 R4.1 | length 30.3
  Top Layer w0.152: R4.1 19.876,23.737 20.803,24.663 29.667,24.663 29.908,24.422 R2.2 31.064,23.927 v1(31.14,23.851) ; R3.1 v1(30.378,10.16)
  Bottom Layer w0.152: v1(30.378,10.16) 30.378,15.265 31.14,16.027 v1(31.14,23.851)
NetR5_2: R5.2 U1.2 | length 4.1
  Top Layer w0.152: U1.2 23.224,13.403 23.647,12.98 R5.2
NetR7_2: R7.2 U1.3 | length 4.5
  Top Layer w0.152: U1.3 23.724,14.3 25.12,12.903 R7.2
NetR13_2: R13.2 U2.14 | length 5.1
  Top Layer w0.152: U2.14 43.354,7.395 43.51,7.239 43.51,5.385 43.167,5.042 R13.2
NetR14_2: R14.2 U2.15 | length 6.3
  Top Layer w0.152: U2.15 43.767,7.795 44.044,7.518 44.044,5.105 45.11,4.039 R14.2
NetR16_1: R16.1 U1.14 | length 2.5
  Top Layer w0.152: U1.14 23.224,20.404 23.444,20.625 R16.1
NetR17_1: R17.1 R19.2 U1.9 | length 5.9
  Top Layer w0.152: U1.9 26.586,17.874 27.392,18.68 R17.1 28.611,18.68 28.931,18.999 28.931,19.939 29.421,20.429 R19.2
NetR30_2: R30.2 U4.3 | length 13.5
  Top Layer w0.152: U4.3 v1(59.878,16.525) ; R30.2 58.991,5.651 59.309,5.969 v1(59.741,5.969)
  Signal Layer 1 w0.152: v1(59.741,5.969) 59.878,6.106 v1(59.878,16.525)
NetR31_2: R31.2 U5.3 | length 2.8
  Top Layer w0.254: U5.3 56.214,2.993 56.594,2.614 R31.2
NetR34_2: R34.2 U6.3 | length 4.4
  Top Layer w0.203: R34.2 21.691,3.632 21.946,3.886 23.876,3.886 24.115,4.125 U6.3
NetTP1_1: TP1.1 U2.4 | length 6.2
  Top Layer w0.178: U2.4 38.726,4.81 39.168,4.367 39.391,4.367 39.7,4.058 39.7,1.829 TP1.1
NetTP2_1: TP2.1 U2.17 | length 5
  Top Layer w0.152: U2.17 43.831,8.595 45.669,6.756 TP2.1
NetTP3_1: TP3.1 U2.19 | length 3.9
  Top Layer w0.152: U2.19 45.088,9.395 45.669,8.814 TP3.1
NetTP4_1: TP4.1 U2.22 | length 3.2
  Top Layer w0.152: U2.22 44.402,10.595 44.763,10.956 TP4.1
NetTP5_1: TP5.1 U2.23 | length 4.8
  Top Layer w0.152: U2.23 43.608,10.995 44.653,12.04 44.653,13.132 45.187,13.665 TP5.1
NRF_ATN: C1.2 L1.1 U2.30 | length 5.1
  Top Layer w0.178: L1.1 39.7,16.662 39.865,16.497 C1.2 39.926,15.383 U2.30
NRF_RESET: C20.2 R1.1 U2.24 | length 43.8
  Top Layer w0.152: U2.24 42.626,13.543 44.271,15.189 v1(49.682,15.189) ; R1.1 67.513,20.295 69.084,21.866 C20.2
  Signal Layer 1 w0.152: v1(49.682,15.189) 49.724,15.189 51.54,17.005 57.152,17.005 61.077,20.93 67.666,20.93 69.084,22.348 C20.2
NRF_RXD: C20.6 J1.2 U2.28 | length 53.4
  Top Layer w0.178: U2.28 40.726,13.412 45.551,18.237 v1(49.632,18.237)
  Signal Layer 1 w0.178: v1(49.632,18.237) 56.642,18.237 61.084,22.679 C20.6
  Signal Layer 2 w0.178: v1(35.179,4.724) 37.592,4.724 47.803,14.935 47.803,17.577 48.463,18.237 v1(49.632,18.237)
  Bottom Layer w0.178: J1.2 33.314,6.695 33.706,7.087 34.773,7.087 35.179,6.68 v1(35.179,4.724)
NRF_SCL: IC1.23 R14.1 R27.1 | length 23.1
  Top Layer w0.152: R14.1 46.966,3.251 v1(47.904,3.251) ; IC1.23 51.492,15.446 51.388,15.55 51.388,16.285 51.537,16.434 53.981,16.434 55.702,14.712 R27.1 v1(55.702,12.446)
  Bottom Layer w0.152: v1(47.904,3.251) 47.904,5.41 52.179,9.684 52.569,9.684 52.849,9.965 53.932,9.965 55.702,11.735 v1(55.702,12.446)
NRF_SDA: IC1.24 R13.1 R28.1 | length 32.5
  Top Layer w0.152: R13.1 41.351,2.642 41.605,2.388 41.935,2.388 v1(42.443,1.88) ; IC1.24 51.083,14.847 51.083,16.438 51.435,16.789 54.056,16.789 56.413,14.432 56.413,11.633 56.21,11.43 R28.1 v1(55.702,10.668)
  Signal Layer 2 w0.152: v1(42.443,1.88) 49.047,1.88 55.702,8.535 v1(55.702,10.668)
NRF_SWCLK: C20.3 U2.25 | length 31.4
  Top Layer w0.152: U2.25 41.926,13.274 44.501,15.85 v1(49.708,15.85)
  Signal Layer 1 w0.152: v1(49.708,15.85) 51.168,17.31 57.026,17.31 60.976,21.26 65.862,21.26 67.084,22.482 C20.3
NRF_SWDIO: C20.4 U2.26 | length 29.8
  Top Layer w0.152: U2.26 41.526,13.332 44.856,16.662 v1(49.682,16.662)
  Signal Layer 1 w0.152: v1(49.682,16.662) 50.635,17.615 56.9,17.615 60.849,21.565 64.084,21.565 65.084,22.565 C20.4
NRF_TXD: C20.5 J1.3 U2.27 | length 55
  Top Layer w0.152: U2.27 41.126,13.363 45.212,17.45 v1(49.657,17.45)
  Signal Layer 1 w0.152: v1(35.738,5.41) 38.354,5.41 46.888,13.945 46.888,15.824 48.514,17.45 v1(49.657,17.45) 50.127,17.92 56.774,17.92 60.723,21.869 62.459,21.869 63.084,22.495 C20.5
  Bottom Layer w0.152: J1.3 32.664,7.163 33.172,7.671 35.077,7.671 35.738,7.01 v1(35.738,5.41)
PPG_INT: IC1.18 R25.1 U3.13 | length 31.9
  Top Layer w0.152: IC1.18 54.549,14.188 v1(54.915,14.554)
  Top Layer w0.178: R25.1 65.1,1.016 v1(66.192,2.108) ; v1(68.253,4.194) v1(68.253,14.1)
  Signal Layer 1 w0.178: v1(66.192,2.108) 66.192,2.134 v1(68.253,4.194)
  Bottom Layer w0.152: v1(54.915,14.554) 65.176,14.554 65.631,14.1 v1(68.253,14.1)
  Bottom Layer w0.178: v1(68.253,14.1) U3.13
PWR_ADC: R32.2 R33.1 U2.5 | length 12.6
  Top Layer w0.152: 43.637,1.016 44.316,0.337 45.626,0.337 46.304,1.016 R33.1
  Top Layer w0.178: U2.5 39.126,4.877 39.305,4.697 39.528,4.697 40.03,4.195 40.03,2.413 41.428,1.016 R32.2 43.637,1.016
REFOUT: C13.2 R15.1 R17.2 U1.8 U2.41 | length 21.6
  Top Layer w0.152: U1.8 27.026,17.374 27.432,17.78 28.473,17.78 29.373,18.68 R17.2 30.647,18.68 31.191,18.136 31.191,15.977 30.487,15.272 C13.2 29.87,15.183 R15.1 29.87,12.751 30.259,12.363 30.265,12.363 30.505,12.122 30.505,11.354 30.734,11.125 31.293,11.125 31.471,11.303 34.57,11.303 36.078,9.795 U2.41
SIGNAL_LED_B: R22.2 U2.6 | length 24.1
  Top Layer w0.152: R22.2 23.165,2.768 v1(23.165,2.032) ; U2.6 39.526,5.149 40.348,4.326 40.348,2.857 v1(41.326,1.88)
  Signal Layer 1 w0.152: v1(23.165,2.032) 23.317,1.88 v1(41.326,1.88)
SIGNAL_LED_G: R20.2 U2.7 | length 19.3
  Top Layer w0.152: R20.2 25.565,2.781 v1(25.654,2.87) ; U2.7 39.926,5.236 v1(40.894,4.267)
  Signal Layer 1 w0.152: v1(25.654,2.87) 26.162,3.378 40.005,3.378 v1(40.894,4.267)
SIGNAL_LED_R: R21.2 U2.43 | length 12.6
  Top Layer w0.152: R21.2 30.721,2.781 v1(30.734,2.794) ; v1(31.725,8.636) 32.083,8.995 U2.43
  Bottom Layer w0.152: v1(30.734,2.794) 30.759,2.769 30.759,7.01 31.725,7.976 v1(31.725,8.636)
V_USB: C20.1 C35.2 DIO1.2 J1.1 R31.1 U5.1 | length 87.8
  Top Layer w0.254: DIO1.2 v1(19.228,2.87) ; U5.1 52.929,2.993 52.601,2.665 C35.2 R31.1 v1(55.677,1.016)
  Signal Layer 1 w0.254: v1(19.228,2.87) 23.8,2.87 24.409,2.261 33.858,2.261 v1(33.964,2.367) 40.365,2.367 40.818,2.819 46.838,2.819 48.641,1.016 v1(55.677,1.016)
  Bottom Layer w0.254: v1(33.964,2.367) J1.1 ; v1(55.677,1.016) 65.049,1.016 65.507,1.473 68.834,1.473 74.955,7.595 74.955,17.628 71.084,21.499 C20.1
pads on no net: IC1.2 IC1.3 IC1.4 IC1.5 IC1.15 IC1.16 IC1.17 IC1.19 IC1.20 IC1.21 J1.4 U2.10 U2.11 U2.12 U2.16 U2.18 U2.20 U2.21 U2.29 U2.39 U2.44 U3.1 U3.5 U3.6 U3.7 U3.8 U3.14 U4.4 U5.4 U6.4 Y1.4

## Polygon pours and split planes (outlines as drawn)
GND on Bottom Layer "GND_L04_P004" (solid, remove dead copper, pour order 4): 0,12.548 0,25 35.992,25 35.992,19.431 52.68,19.431 52.68,25 70,25 80,25 80,12.37 80,0 10.338,0 0,0 0,11.049
GND on Top Layer "GND_L01_P006" (solid, remove dead copper, pour order 6): 0,12.776 0,25 35.916,25 35.916,19.482 52.705,19.482 52.705,25 68.91,25 80.035,25 80.035,13.106 80.035,0 48.285,0 0,0 0,11.328
1V8 on Signal Layer 2 "Top Layer-No Net" (solid, remove dead copper, pour order 8): 0,13.03 0,25 43.459,25 80,25 80,12.598 80,0 33.96,0 0,0 0,11.176

## Keep-outs
Keep-Out Layer:
  the board outline again, w0.203

## Silkscreen, mask and mechanical layers (free items; w line width, h text height)
Top Overlay:
  circle w0.254: c9,12.5 r8.2
  circle w0.254: c71,12.5 r8.2
  text "GND" at 56.794,22.454 h0.51 r270
  text "GND" at 58.796,22.454 h0.51 r270
  text "RX" at 60.798,22.454 h0.51 r270
  text "TX" at 62.8,22.454 h0.51 r270
  text "SWD" at 64.801,22.454 h0.51 r270
  text "SWC" at 66.803,22.454 h0.51 r270
  text "RESET" at 68.805,22.454 h0.51 r270
  text "V_USB" at 70.891,22.454 h0.51 r270
  text "." at 18.212,15.088 h1.02
  text "RL" at 9.042,2.946 h0.76
  text "LA" at 70.866,2.769 h0.76
Bottom Overlay:
  circle w0.254: c9,12.5 r8.2
  text "RA" at 6.756,3.073 h0.76
  text "ELCOM" at 42.596,0.508 h1.02